# EAGLE board CarteCapteur (EAGLE 5.00)
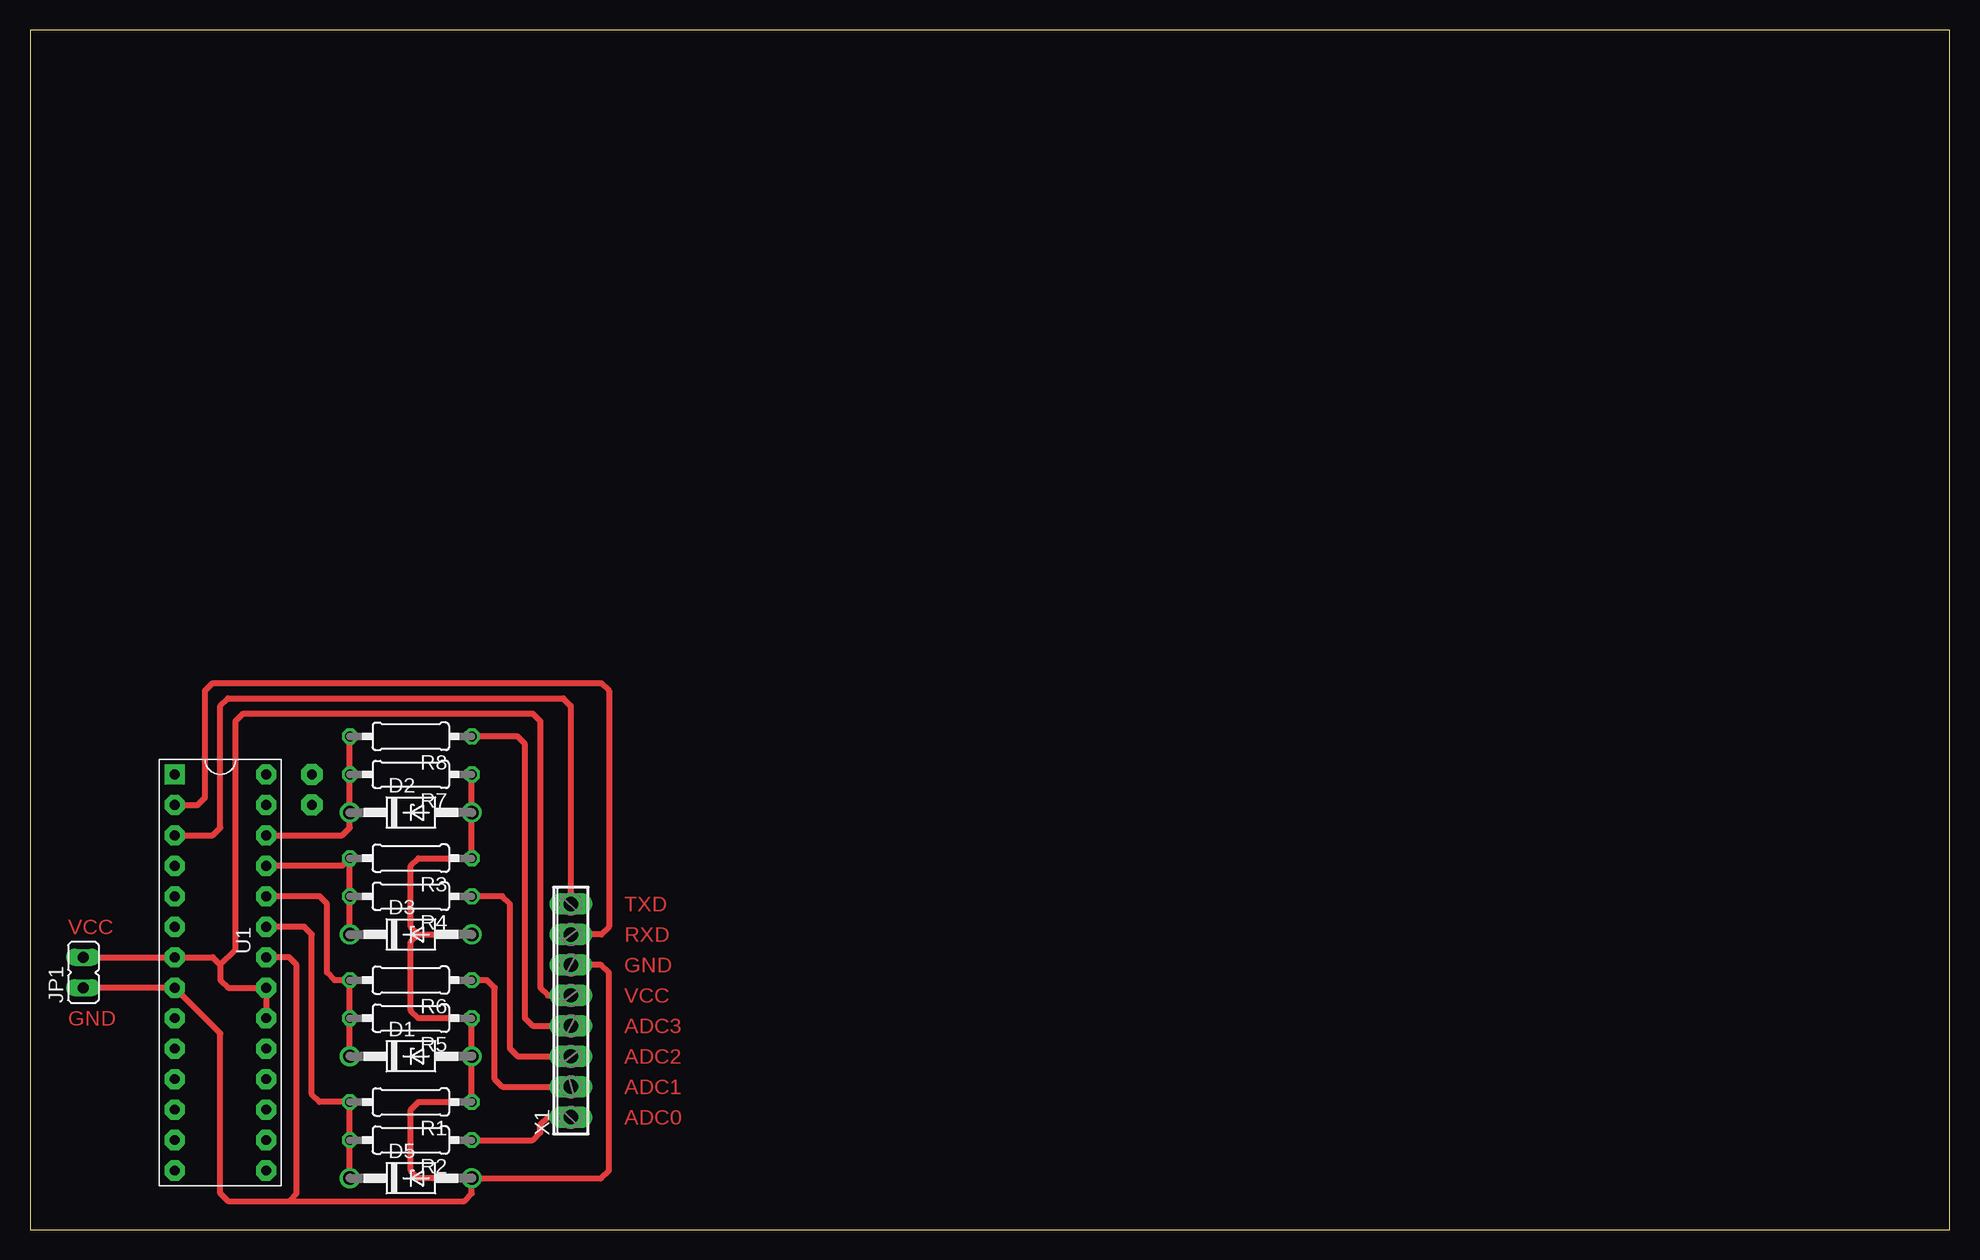
[diagram p0: board, top side]

Size 160 x 100 mm. Coordinates in mm from the lower left corner, seen from the top.
Outline: 0,0 160,0 160,100 0,100 0,0
Copper layers (1*16): Top 0.035mm / dielectric 1.5mm / Bottom 0.035mm
Design rules "default": minimum track width 10mil, minimum drill 24mil, track to track 8mil, track to pad 8mil, pad to pad 8mil, via to via 8mil, smd to smd 8mil, copper to edge 40mil, drill to drill 8mil, minimum pad ring 10mil, minimum via ring 8mil, stop-mask expansion 4mil, vias tented up to drill 0mil, thermal gap 10mil

## Footprints (pad centres in the part's own frame; a part is rotated, then mirrored left to right if it is on the bottom)
DO41Z10 = drill 1.118 round: A 5.08,0; C -5.08,0
JP1 = drill 0.914 long: 1 0,-1.27; 2 0,1.27
0207/10 = drill 0.813 octagon: 1 -5.08,0; 2 5.08,0
AT28DIP = drill 0.813 pad 1.676 square: 1 0,0 | drill 0.813 pad 1.676 octagon: 2 2.54,0; 3 5.08,0; 4 7.62,0; 5 10.16,0; 6 12.7,0; 7 15.24,0; 8 17.78,0; 9 20.32,0; 10 22.86,0; 11 25.4,0; 12 27.94,0; 13 30.48,0; 14 33.02,0; 15 33.02,7.62; 16 30.48,7.62; 17 27.94,7.62; 18 25.4,7.62; 19 22.86,7.62; 20 20.32,7.62; 21 17.78,7.62; 22 15.24,7.62; 23 12.7,7.62; 24 10.16,7.62; 25 7.62,7.62; 26 5.08,7.62; 27 2.54,7.62; 28 0,7.62
8POL254 = drill 1.2 long: 1 -8.89,0; 2 -6.35,0; 3 -3.81,0; 4 -1.27,0; 5 1.27,0; 6 3.81,0; 7 6.35,0; 8 8.89,0

## Placement (x,y rotation side)
D1  1N4728  [DO41Z10]  31.74,14.44 0 top
D2  1N4728  [DO41Z10]  31.74,34.76 0 top
D3  1N4728  [DO41Z10]  31.74,24.6 0 top
D5  1N4728  [DO41Z10]  31.74,4.28 0 top
JP1  [JP1]  4.44,21.42 0 top
R1  [0207/10]  31.74,10.63 180 top
R2  [0207/10]  31.74,7.46 180 top
R3  [0207/10]  31.74,30.95 180 top
R4  [0207/10]  31.74,27.77 180 top
R5  [0207/10]  31.74,17.61 180 top
R6  [0207/10]  31.74,20.79 180 top
R7  [0207/10]  31.74,37.94 180 top
R8  [0207/10]  31.74,41.11 180 top
U1  [AT28DIP]  12.06,37.94 270 top
X1  [8POL254]  45.08,18.25 90 top

## Library data of the parts
D1-D3 D5 = diode
JP1 = jumper
R1-R8 = rcl
U1 = ATMELµC
X1 = con-phoenix-254

## Nets
GND: D1.A D2.A D3.A D5.A JP1.1 R1.1 R3.1 R5.1 R7.1 U1.8 U1.22 X1.6
N$1: D5.C R1.2 R2.2 U1.23
N$2: D1.C R5.2 R6.2 U1.24
N$3: D3.C R3.2 R4.2 U1.25
N$4: D2.C R7.2 R8.2 U1.26
N$5: R2.1 X1.1
N$6: R6.1 X1.2
N$7: R4.1 X1.3
N$8: R8.1 X1.4
RXD: U1.2 X1.7
TXD: U1.3 X1.8
VCC: JP1.2 U1.7 U1.20 U1.21 X1.5

## Tracks (layer width: path | path; a pad name or v marks a point on that pad's centre or on a via)
GND
  Top 0.508: D1.A R1.1 32.38,10.63 31.74,10 31.74,4.92 32.38,4.28 D5.A | D1.A R5.1 | R7.1 D2.A R3.1 32.38,30.95 31.74,30.31 31.74,25.23 32.38,24.6 | JP1.1 U1.8 15.87,16.34 15.87,3.01 16.5,2.38 21.58,2.38 | 32.38,24.6 D3.A | 32.38,24.6 31.74,23.96 31.74,18.25 32.38,17.61 R5.1 | D5.A 36.83,3.01 36.19,2.38 21.58,2.38 | D1.A R5.1 | X1.6 47.62,22.06 48.26,21.42 48.26,4.92 47.62,4.28 D5.A | U1.22 21.58,22.7 22.22,22.06 22.22,3.01 21.58,2.38
N$1
  Top 0.508: D5.C R2.2 R1.2 24.12,10.63 23.49,11.27 23.49,24.6 22.86,25.23 U1.23
N$2
  Top 0.508: D1.C R5.2 R6.2 25.39,20.79 24.76,21.42 24.76,27.14 24.12,27.77 U1.24
N$3
  Top 0.508: U1.25 26.03,30.31 R3.2 R4.2 D3.C
N$4
  Top 0.508: R8.2 R7.2 D2.C 26.66,33.49 26.03,32.85 U1.26
N$5
  Top 0.508: R2.1 41.91,7.46 42.54,8.09 42.54,8.73 43.18,9.36 X1.1
N$6
  Top 0.508: R6.1 38.1,20.79 38.73,20.15 38.73,12.54 39.37,11.9 X1.2 45.72,11.9
N$7
  Top 0.508: R4.1 39.37,27.77 40,27.14 40,15.08 40.64,14.44 X1.3
N$8
  Top 0.508: R8.1 40.64,41.11 41.27,40.48 41.27,17.61 41.91,16.98 X1.4
N$11  (via drill 0.81 pad 1.78)
  other vias: 23.49,37.94
N$12  (via drill 0.81 pad 1.78)
  other vias: 23.49,35.39
RXD
  Top 0.508: U1.2 13.97,35.39 14.6,36.03 14.6,44.92 15.24,45.55 47.62,45.55 48.26,44.92 48.26,25.23 47.62,24.6 X1.7
TXD
  Top 0.508: U1.3 15.24,32.85 15.87,33.49 15.87,43.65 16.5,44.28 44.45,44.28 45.08,43.65 X1.8
VCC
  Top 0.508: JP1.2 U1.7 15.24,22.7 15.87,22.06 | 15.87,22.06 15.87,20.79 16.5,20.15 U1.21 U1.20 | X1.5 43.18,19.52 42.54,20.15 42.54,42.38 41.91,43.02 17.77,43.02 17.14,42.38 17.14,23.33 15.87,22.06

## Text on the board
Top: TXD | VCC | RXD | GND | VCC | GND | ADC3 | ADC2 | ADC1 | ADC0